# EAGLE board act_ctrl (EAGLE 6.6.0)
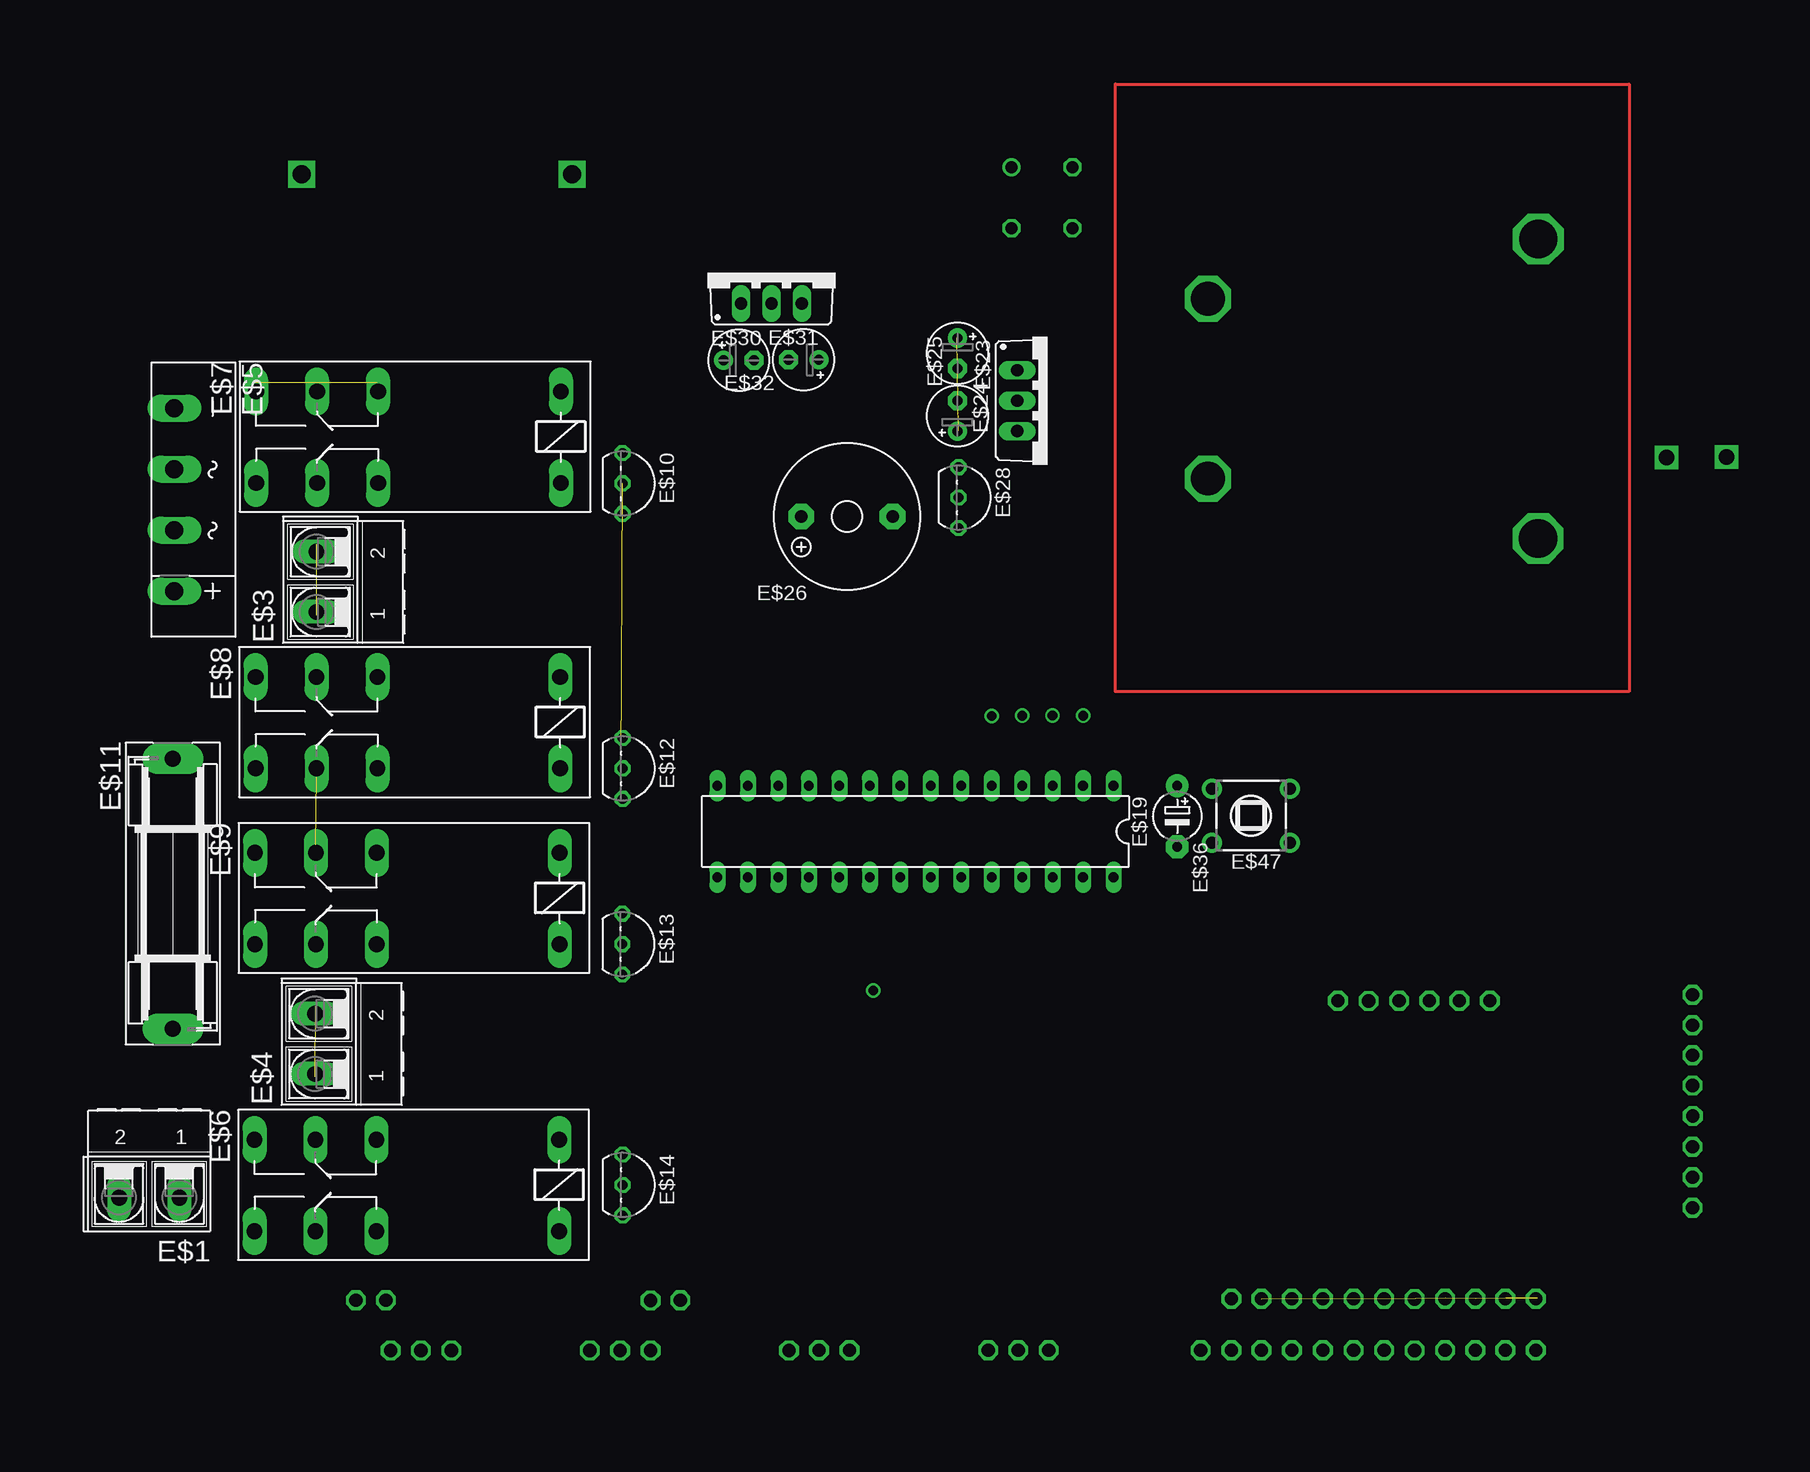
[diagram p0: board, top side]
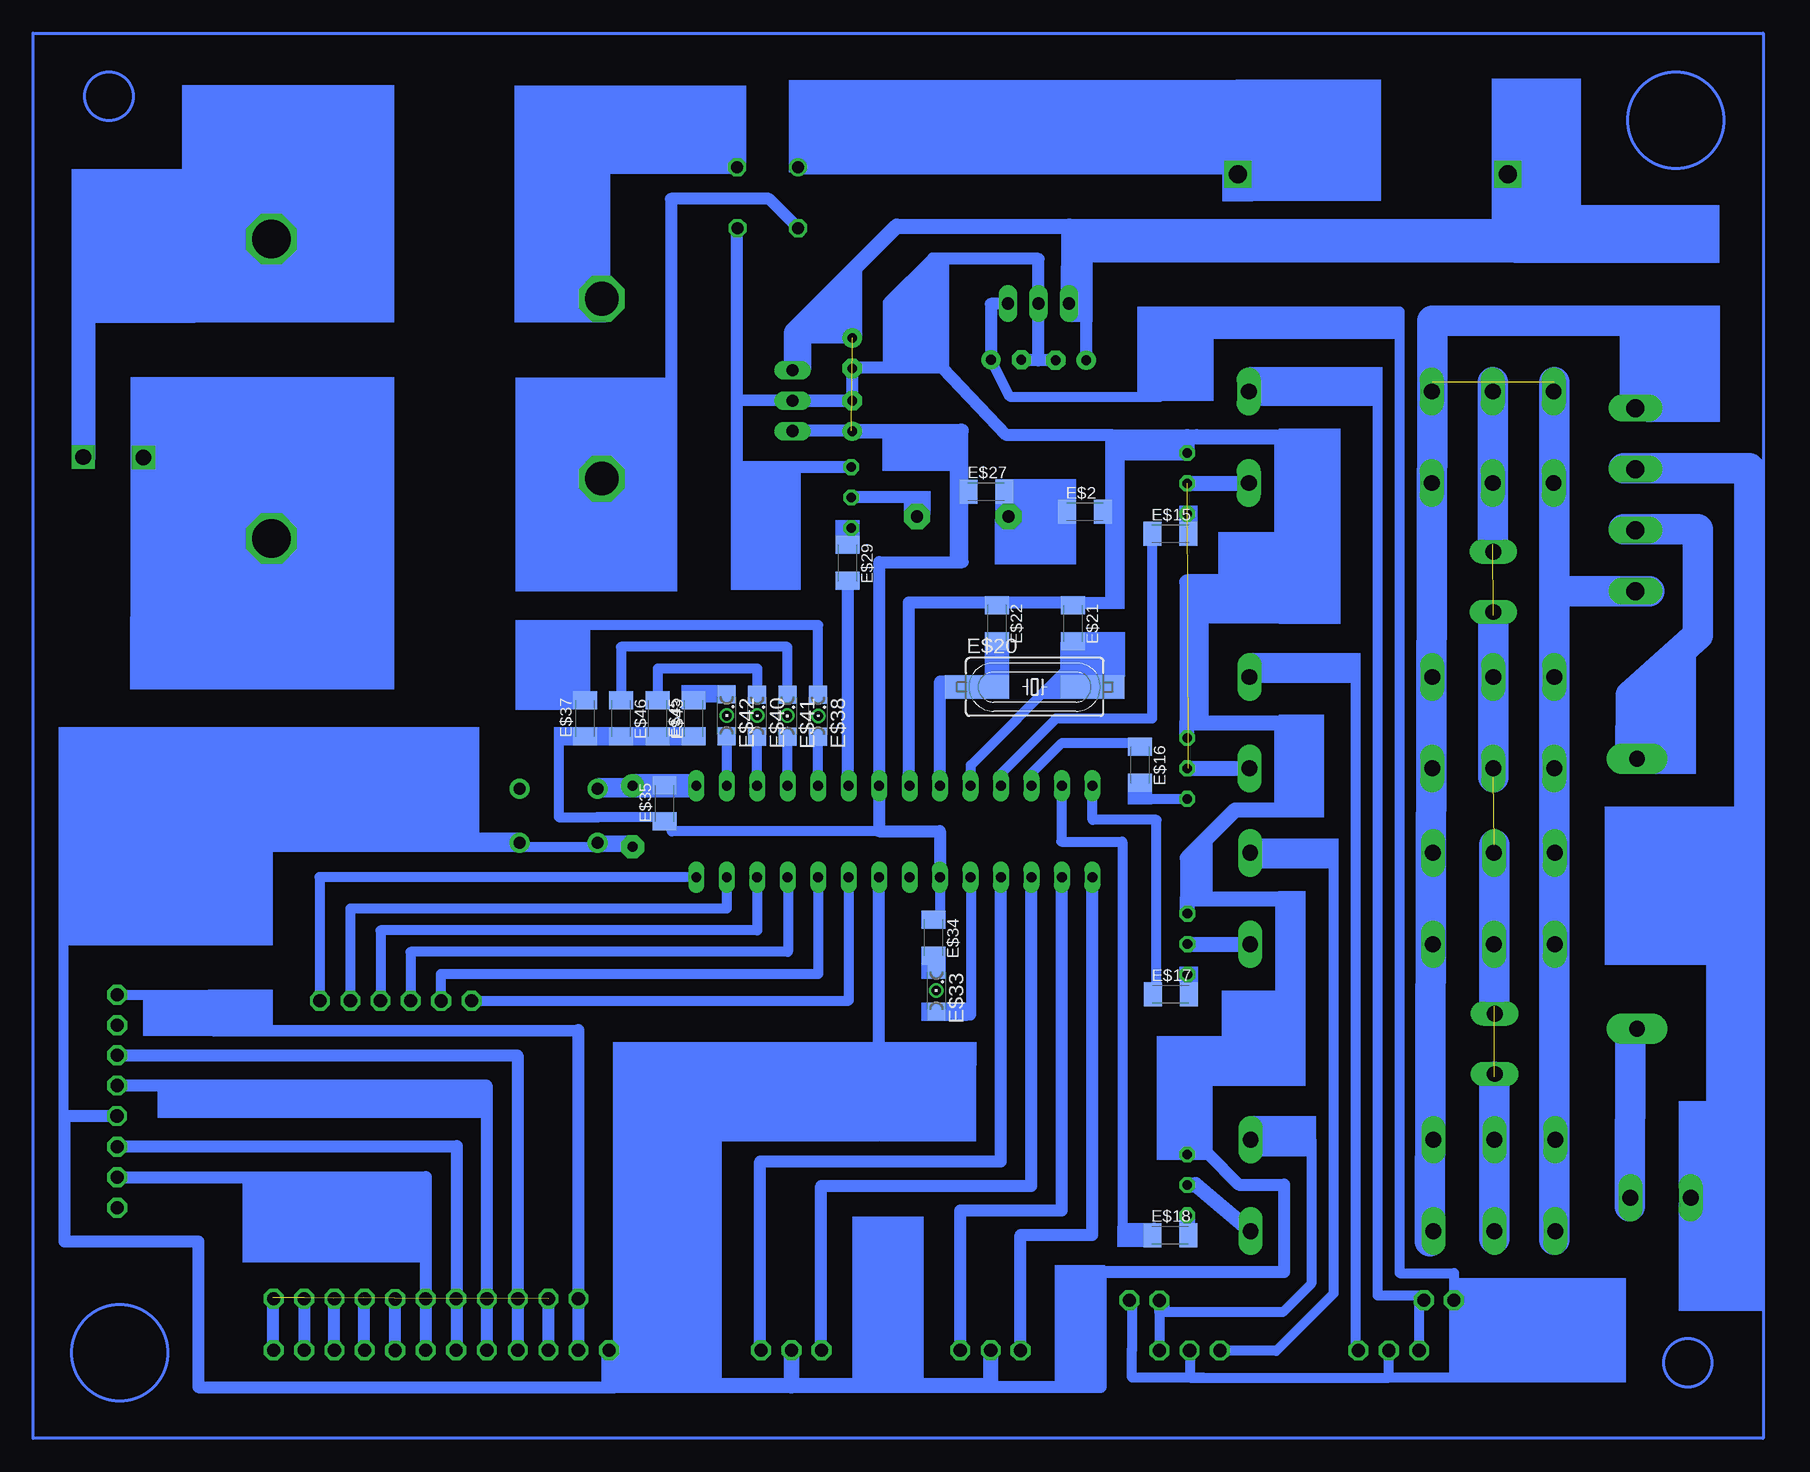
[diagram p1: board, bottom side, seen from below]

No outline drawn. Coordinates in mm, seen from the top.
Copper layers (1*16): Top 0.035mm / dielectric 1.5mm / Bottom 0.035mm
Design rules "default": minimum track width 10mil, minimum drill 24mil, track to track 8mil, track to pad 8mil, pad to pad 8mil, via to via 8mil, smd to smd 8mil, copper to edge 40mil, drill to drill 8mil, minimum pad ring 10mil, minimum via ring 8mil, stop-mask expansion 4mil, vias tented up to drill 0mil, thermal gap 10mil

## Footprints (pad centres in the part's own frame; a part is rotated, then mirrored left to right if it is on the bottom)
AK500/2-H = drill 1.321 long: 1 -2.515,0; 2 2.515,0
C1206K = smd 1.5 x 2: 1 -1.5,0; 2 1.5,0
FBU4 = drill 1.499 long: + 7.62,-1.54; - -7.62,-1.54; AC1 2.54,-1.54; AC2 -2.54,-1.54
F4052 = drill 1.321 long: 1 -3.81,3.81; 2 -3.81,-3.81; O1 11.43,-3.81; O2 11.43,3.81; P1 16.51,-3.81; P2 16.51,3.81; S1 21.59,-3.81; S2 21.59,3.81
TO92- = drill 0.813 octagon: 1 -2.54,0; 2 0,0; 3 2.54,0
SH22,5 = drill 1.321 pad 2.54 long: 1 -11.252,0; 2 11.252,0
DIL28-3 = drill 0.813 long: 1 -16.51,-3.81; 2 -13.97,-3.81; 3 -11.43,-3.81; 4 -8.89,-3.81; 5 -6.35,-3.81; 6 -3.81,-3.81; 7 -1.27,-3.81; 8 1.27,-3.81; 9 3.81,-3.81; 10 6.35,-3.81; 11 8.89,-3.81; 12 11.43,-3.81; 13 13.97,-3.81; 14 16.51,-3.81; 15 16.51,3.81; 16 13.97,3.81; 17 11.43,3.81; 18 8.89,3.81; 19 6.35,3.81; 20 3.81,3.81; 21 1.27,3.81; 22 -1.27,3.81; 23 -3.81,3.81; 24 -6.35,3.81; 25 -8.89,3.81; 26 -11.43,3.81; 27 -13.97,3.81; 28 -16.51,3.81
HC49UP = smd 5.334 x 1.93: 1 -4.826,0; 2 4.826,0
TO220V = drill 1.016 long: 1 -2.54,-2.54; 2 0,-2.54; 3 2.54,-2.54
E2,5-5 = drill 0.813 pad 1.6: + -1.27,0 | drill 0.813 pad 1.6 octagon: - 1.27,0
F/TMB = drill 1.016 pad 2.159 octagon: + 3.81,0; - -3.81,0
SML1206 = smd 1.5 x 1.5: A 1.75,0; C -1.75,0
E5-4 = drill 0.813 pad 1.905: + -2.54,0 | drill 0.813 pad 1.905 octagon: - 2.54,0
TL1105T = drill 1 pad 1.676: 1 -2.25,3.25; 2 2.25,3.25; 3 -2.25,-3.25; 4 2.25,-3.25

## Placement (x,y rotation side)
E$1  [AK500/2-H]  5.35,5.22 180 top
E$2  [C1206K]  53.34,62.36 0 bottom
E$3  [AK500/2-H]  19.29,56.54 90 top
E$4  [AK500/2-H]  19.17,18.04 90 top
E$5  [FBU4]  8.99,63.39 270 top
E$6  [F4052]  35.71,6.24 180 top
E$7  [F4052]  35.85,68.59 180 top
E$8  [F4052]  35.8,44.8 180 top
E$9  [F4052]  35.75,30.14 180 top
E$10  [TO92-]  44.8,64.74 270 top
E$11  [SH22,5]  7.31,30.54 270 top
E$12  [TO92-]  44.81,40.99 270 top
E$13  [TO92-]  44.78,26.35 270 top
E$14  [TO92-]  44.81,6.28 270 top
E$15  [C1206K]  46.2,60.54 0 bottom
E$16  [C1206K]  48.73,41.29 270 bottom
E$17  [C1206K]  46.18,22.16 0 bottom
E$18  [C1206K]  46.22,2.1 0 bottom
E$19  [DIL28-3]  69.22,35.73 180 top
E$20  [HC49UP]  57.51,47.78 0 bottom
E$21  [C1206K]  54.34,53.08 270 bottom
E$22  [C1206K]  60.67,53.1 270 bottom
E$23  [TO220V]  80.24,71.64 270 top
E$24  [E2,5-5]  72.73,75.59 270 top
E$25  [E2,5-5]  72.72,70.36 90 top
E$26  [F/TMB]  63.51,61.98 180 top
E$27  [C1206K]  61.54,64.06 0 bottom
E$28  [TO92-]  72.81,63.56 270 top
E$29  [C1206K]  73.12,58.12 270 bottom
E$30  [TO220V]  57.21,82.28 0 top
E$31  [E2,5-5]  54.5,75 0 top
E$32  [E2,5-5]  59.9,75.04 180 top
E$33  [SML1206]  65.71,22.47 270 bottom
E$34  [C1206K]  65.96,26.89 270 bottom
E$35  [C1206K]  88.38,38.07 90 bottom
E$36  [E5-4]  91.04,37 270 top
E$37  [C1206K]  95,45.16 90 bottom
E$38  [SML1206]  75.57,45.38 270 bottom
E$40  [SML1206]  80.64,45.38 270 bottom
E$41  [SML1206]  78.13,45.36 270 bottom
E$42  [SML1206]  83.19,45.4 270 bottom
E$43  [C1206K]  88.95,45.15 270 bottom
E$45  [C1206K]  85.95,45.15 90 bottom
E$46  [C1206K]  92.01,45.16 270 bottom
E$47  [TL1105T]  97.19,37.05 90 top

## Library data of the parts
E$1 E$3 E$4 = con-ptr500
E$2 E$15-E$18 E$21 E$22 E$24 E$25 E$27 E$29 E$31 E$32 E$34-E$37 E$43 E$45 E$46 = rcl
E$5 = rectifier
E$6-E$9 = relay
E$10 E$12-E$14 E$28 = maxim
E$11 = fuse
E$19 = 40xx
E$20 = crystal
E$23 E$30 = transistor-pnp
E$26 = buzzer
E$33 E$38 E$40-E$42 = led
E$47 = switch

## Nets
S$38: E$10.2
S$58: E$30.2 E$31.-
S$81: E$9.2
S$98: E$19.16
S$140: E$19.27

## Tracks (layer width: path | path; a pad name or v marks a point on that pad's centre or on a via)
S$1
  Bottom 0.254: -3.21,-14.85 141.01,-14.85 141.01,102.27 -3.21,102.27 -3.21,-14.85
S$2  (via drill 1.1)
  other vias: 92.99,-7.5
S$3  (via drill 1.1)
  other vias: 95.55,-7.5
S$4  (via drill 1.1)
  other vias: 98.06,-7.5
S$5  (via drill 1.1)
  other vias: 100.6,-7.5
S$6  (via drill 1.1)
  other vias: 103.18,-7.5
S$7  (via drill 1.1)
  other vias: 105.74,-7.5
S$8  (via drill 1.1)
  other vias: 108.28,-7.5
S$9
  Top 0.254: 85.9,98.01 128.71,98.01 128.71,47.39 85.88,47.39 85.88,98.02
S$10  (via drill 1.1)
  other vias: 110.83,-7.51
S$11  (via drill 1.1)
  other vias: 113.37,-7.5
S$12  (via drill 1.1)
  other vias: 115.89,-7.5
S$13  (via drill 1.1)
  other vias: 118.4,-7.5
S$14  (via drill 1.1)
  other vias: 120.94,-7.5
S$15  (via drill 1.1)
  other vias: 75.28,-7.5
S$16
  Bottom 1.016: 44.83,8.87 43.08,8.87 40.52,6.31 36.73,6.31 36.73,-0.99 52.02,-0.99 52.02,-10.56 61.33,-10.56
S$17  (via drill 1.1)
  other vias: 80.33,-7.5
S$18  (via drill 1.1)
  other vias: 63.72,-7.5
S$19
  Bottom 0.813: 61.2,75.1 59.61,71.98 47,71.98 41.31,79.07 27.1,79.07 27.1,-1.08 22.57,-1.08 22.57,-9.77 28,-9.77 | 28,-9.77 28,-7.51 | 44.59,-7.5 44.59,-9.77 28,-9.77
S$20  (via drill 1.1)
  other vias: 61.18,-7.5
S$21  (via drill 1.1)
  other vias: 63.72,-7.5
S$22  (via drill 2.8)
  other vias: 93.6,80.13
S$23  (via drill 2.8)
  other vias: 93.6,65.14
S$24  (via drill 3.2)
  other vias: 121.13,60.15
S$25  (via drill 3.2)
  other vias: 121.14,85.1
S$26  (via drill 1.3)
  other vias: 131.81,66.91
S$27  (via drill 1.3)
  other vias: 136.83,66.94
S$28
  Bottom 2.54: 8.39,66.01 -2.04,65.99 -2.05,5.03 2.49,5.03
S$29
  Bottom 2.54: 8.43,60.91 2.24,60.91 2.24,52.08 7.84,47.07 7.87,42.1
S$30
  Bottom 1.27: 121.25,85.1 137.19,85.01 137.19,67.05
S$31
  Bottom 1.27: 121.17,60.21 121.2,66.87 131.46,66.89
S$32  (3 unrouted)
  Bottom 2.54: 19.29,53.74 19.29,40.27 | 19.32,73.15 19.32,59.68 | 19.22,34.64 19.22,21.17 | 19.19,15.28 19.19,1.81
S$33  (1 unrouted)
  Bottom 2.54: 14.22,73.15 14.22,1.7 | 24.36,73.18 24.56,1.6
S$34
  Bottom 2.54: 7.51,71.35 7.51,78.29 24.37,78.29 24.37,71.63
S$35
  Bottom 2.54: 6.3,55.77 13.94,55.75
S$36
  Bottom 1.27: 82.34,91.13 93.55,91.13 93.55,80.06
S$37
  Bottom 1.016: 77.65,71.66 77.63,71.64 72.59,71.64 82.33,71.66 82.32,86.02
S$38  (1 unrouted)
  Bottom 1.27: E$10.2 39.62,64.74 39.62,64.75 | 44.7,40.99 39.52,40.99
S$39
  Bottom 1.27: 44.8,67.26 44.8,68.63 36.97,68.63 36.97,56.53 44.84,56.53 44.84,44.8 | 44.84,43.51 44.84,44.8 | 44.84,44.8 36.95,44.8 36.95,37.52 40.81,37.52 44.79,33.54 44.79,30.13 | 44.79,28.9 44.79,30.13 | 44.79,30.13 36.86,30.13 36.86,18.03 44.8,18.03 44.8,8.83
S$40
  Bottom 1.27: 44.82,6.28 44.11,6.3 39.52,2.4
S$41
  Bottom 0.813: 44.79,38.41 48.74,38.41 48.74,39.89
S$42
  Bottom 0.813: 39.69,72.38 28.94,72.38 28.94,-2.92 25.51,-2.92 25.51,-7.55
S$43
  Bottom 0.813: 47.74,60.62 47.74,45.14 55.73,45.14 60.49,40.38
S$44
  Bottom 0.813: 57.82,39.53 57.82,40.54 55.24,43.12 49.25,43.12
S$45
  Bottom 0.813: 47.77,22.12 47.35,22.12 47.35,36.7 52.7,36.7 52.7,39.52 52.67,39.52
S$46
  Bottom 0.813: 55.3,39.59 55.3,34.89 50.21,34.89 50.21,2.72 47.57,2.72
S$47
  Bottom 0.813: 62.84,39.52 62.84,41.26 54.9,49.2
S$48
  Bottom 1.016: 65.4,39.51 65.4,48.24 63.55,48.24
S$49
  Bottom 1.016: 68,39.48 68,54.82 53.95,54.82
S$50
  Bottom 1.016: 54.73,54.81 51.11,54.81 51.11,68.76 44.01,68.76
S$51  (via drill 1)
  other vias: 77.23,91.09
S$52  (via drill 1)
  other vias: 82.32,91.09
S$53  (via drill 1)
  other vias: 82.29,86.02
S$54
  Bottom 1.016: 77.24,86.03 79.66,88.45 87.84,88.45 87.84,65.09 93.88,65.09
S$55
  Bottom 1.27: 77.78,74.15 77.78,77.42 69.03,86.17 54.64,86.17 | 54.69,79.67 54.64,86.17 | 54.64,86.17 18.08,86.17 18.08,90.51
S$56  (1 unrouted)
  Bottom 1.016: 72.7,76.89 77.6,76.89 77.6,76.92 | 72.8,69.12 77.7,69.12
S$57
  Bottom 1.016: 72.73,74.46 72.73,71.63
S$58
  Bottom 1.016: E$31.- 57.21,75 57.21,75.04 | 58.65,75.04 57.21,75.04 | 57.21,75.04 E$30.2
S$59
  Bottom 1.016: 59.79,79.71 61.16,79.71 61.16,75.09
S$60
  Bottom 1.27: 59.67,61.99 55.71,61.99
S$61
  Bottom 1.016: 70.46,39.56 70.46,58.18 63.53,58.18 63.53,69.2
S$62
  Bottom 1.27: 72.71,69.11 63.64,69.1
S$63
  Bottom 1.016: 67.35,61.99 67.35,63.57 72.8,63.57
S$64
  Bottom 1.016: 72.81,66.07 82.34,66.07 82.34,72.18
S$65
  Bottom 1.016: 73.08,39.53 73.08,56.58
S$66
  Bottom 1.016: 53.22,75 53.22,79.74 54.75,79.74
S$67
  Bottom 1.27: 40.67,90.47 40.67,91.08 77.27,91.08
S$68  (via drill 1)
  other vias: 77.23,86.02
S$69  (via drill 1.1)
  other vias: 58.69,-7.51
S$70  (via drill 1.1)
  other vias: 47.13,-7.51
S$71  (via drill 1.1)
  other vias: 42.08,-7.51
S$72  (via drill 1.1)
  other vias: 44.59,-7.51
S$73  (via drill 1.1)
  other vias: 47.13,-7.51
S$74  (via drill 1.1)
  other vias: 30.53,-7.52
S$75  (via drill 1.1)
  other vias: 25.48,-7.52
S$76  (via drill 1.1)
  other vias: 27.99,-7.52
S$77  (via drill 1.1)
  other vias: 30.53,-7.52
S$78
  Bottom 0.813: 39.66,48.56 30.78,48.56 30.78,-7.51 30.5,-7.51
S$79  (via drill 1.1)
  other vias: 22.57,-3.34
S$80  (via drill 1.1)
  other vias: 25.08,-3.34
S$81
  Bottom 0.813: E$9.2 32.61,33.95 32.61,-2.78 37.38,-7.55 42.14,-7.55
S$82
  Bottom 0.813: 39.53,10.08 34.46,10.08 34.46,-1.95 36.84,-4.33 47.13,-4.33 47.13,-7.55
S$83
  Bottom 0.813: 43.46,-9.78 49.39,-9.78 49.39,-7.32
S$84
  Bottom 2.54: 7.89,4.49 7.87,19.06
S$85  (via drill 1.1)
  other vias: 49.62,-3.34
S$86  (via drill 1.1)
  other vias: 47.13,-3.35
S$87  (via drill 1.5)
  other vias: 18.07,90.5
S$88
  Bottom 0.813: 49.39,-3.28 49.39,-7.48
S$89  (via drill 1.5)
  other vias: 40.59,90.5
S$90
  Bottom 1.016: 77.23,91.11 74.8,91.11
S$91
  Bottom 1.016: 57.2,79.6 57.2,83.45 65.15,83.45 65.15,74.36 72.75,74.36
S$92
  Bottom 1.016: 51.09,68.76 59.86,68.76 65.18,74.35
S$93
  Bottom 1.016: 84.06,-10.23 84.06,10.42 70.49,10.42 70.49,32.04
S$94  (via drill 1.1)
  Bottom 1.27: 61.21,-7.5 61.21,-10.45 77.79,-10.45 v77.79,-7.5 77.79,-10.46 92.99,-10.46 92.99,-7.52
S$95
  Bottom 1.016: 70.51,39.5 70.51,35.76 65.43,35.76 65.42,31.53
S$96
  Bottom 1.27: 44.71,26.34 39.53,26.34
S$97
  Bottom 1.016: 58.69,-7.49 58.69,2.12 52.71,2.12 52.71,31.96
S$98
  Bottom 1.016: 63.72,-7.49 63.72,4.16 55.25,4.16 E$19.16
S$99
  Bottom 1.016: 75.32,-7.49 75.32,6.21 57.79,6.21 57.79,31.97
S$100
  Bottom 1.016: 80.39,-7.5 80.39,8.25 60.33,8.25 60.33,31.96
S$101  (via drill 0.8)
  other vias: 75.57,45.36
S$102
  Bottom 0.813: 62.84,31.93 62.84,20.38 65.1,20.38
S$103
  Bottom 0.813: 65.43,31.93 65.43,28.38
S$104  (via drill 1.1)
  other vias: 134,4.37
S$105  (via drill 1.1)
  other vias: 134,6.93
S$106  (via drill 1.1)
  other vias: 134,9.47
S$107  (via drill 1.1)
  other vias: 134.01,12.02
S$108  (via drill 1.1)
  other vias: 134,14.56
S$109  (via drill 1.1)
  other vias: 134,17.08
S$110  (via drill 1.1)
  other vias: 134,19.59
S$111  (via drill 1.1)
  other vias: 134,22.13
S$112
  Bottom 1.016: 133.98,12.01 138.39,12.01 138.39,1.58 127.23,1.58 127.23,-10.57 92.5,-10.57
S$113
  Bottom 1.016: 125.95,19.13 95.56,19.18 95.56,-7.65
S$114
  Bottom 1.016: 133.96,17.08 100.63,17.08 100.63,-7.65
S$115
  Bottom 1.016: 133.96,14.58 103.21,14.58 103.21,-7.49
S$116
  Bottom 1.016: 134.04,6.93 108.28,6.93 108.28,-7.57
S$117
  Bottom 1.016: 133.96,9.51 105.7,9.51 105.7,-7.57
S$118  (via drill 1.1)
  other vias: 104.44,21.62
S$119  (via drill 1.1)
  other vias: 106.99,21.61
S$120  (via drill 1.1)
  other vias: 109.53,21.62
S$121  (via drill 1.1)
  other vias: 112.05,21.62
S$122  (via drill 1.1)
  other vias: 114.56,21.62
S$123  (via drill 1.1)
  other vias: 117.1,21.62
S$124  (via drill 1.1)
  other vias: 95.55,-3.21
S$125  (via drill 1.1)
  other vias: 98.06,-3.21
S$126  (via drill 1.1)
  other vias: 100.6,-3.21
S$127  (via drill 1.1)
  other vias: 103.18,-3.21
S$128  (via drill 1.1)
  other vias: 105.74,-3.21
S$129  (via drill 1.1)
  other vias: 108.28,-3.21
S$130  (via drill 1.1)
  other vias: 110.83,-3.22
S$131  (via drill 1.1)
  other vias: 113.37,-3.21
S$132  (via drill 1.1)
  other vias: 115.89,-3.21
S$133  (via drill 1.1)
  other vias: 118.4,-3.21
S$134  (via drill 1.1)
  other vias: 120.94,-3.21
S$135  (5 unrouted)
  Bottom 1.016: 98.05,-3.19 98.07,-3.19 98.07,-7.57 | 110.87,-3.17 110.87,-7.55 | 113.44,-3.12 113.44,-7.5 | 115.95,-3.17 115.95,-7.55 | 118.41,-3.12 118.41,-7.5 | 121.04,-3.12 121.04,-7.5
S$136
  Bottom 0.813: 104.42,21.64 73,21.64 73,31.99
S$137
  Bottom 0.813: 75.57,31.93 75.57,23.85 107.02,23.85 107.02,21.58
S$138
  Bottom 0.813: 78.09,31.93 78.09,25.71 109.55,25.71 109.55,21.56
S$139
  Bottom 0.813: 80.64,31.92 80.64,27.49 112.05,27.49 112.05,21.57
S$140
  Bottom 0.813: E$19.27 83.19,29.3 114.57,29.3 114.57,21.54
S$141
  Bottom 0.813: 85.72,31.94 117.12,31.94 117.12,21.54
S$142
  Bottom 0.813: 134.01,22.12 126.06,22.12 126.06,19.12
S$143
  Bottom 0.813: 90.93,34.42 138.49,34.4 138.49,11.16
S$144
  Bottom 0.813: 85.69,39.74 93.94,39.74
S$145
  Bottom 0.813: 69.65,35.75 87.78,35.75 87.78,36.91 93.98,36.92
S$146
  Bottom 0.813: 85.93,43.56 97.2,43.56 97.2,36.92 93.81,36.92
S$147
  Bottom 0.813: 80.63,47.21 80.63,49.3 88.95,49.3 88.95,46.61
S$148
  Bottom 0.813: 78.13,46.83 78.13,51.12 92.01,51.12 92.01,46.93
S$149  (via drill 0.8)
  other vias: 78.13,45.38
S$150  (via drill 0.8)
  other vias: 80.64,45.4
S$151  (via drill 0.8)
  other vias: 83.19,45.38
S$152  (via drill 0.8)
  other vias: 65.71,22.48
S$153
  Bottom 0.813: 75.56,47.16 75.56,52.94 95,52.94 95,46.46
S$154
  Bottom 0.813: 75.58,39.56 75.58,43.79 | 78.11,39.32 78.11,43.55 | 80.64,39.32 80.64,43.55 | 83.17,39.26 83.17,43.49
S$155
  Bottom 0.813: 64.58,83.53 64.58,83.55 66.05,83.55 69.77,79.83 69.77,74.73
(copper drawn outside any net)
  shapes: Bottom area x116, Bottom circle x4